# Altium PCB 3043-1-1532.PcbDoc
Units mm, origin at the board's own origin, x right, y up, seen from the top; angles counter-clockwise.
Board outline 79 x 79 mm, 2 copper layers (Top Layer, Bottom Layer); 72 components, 70 nets, 313 pads, 173 vias.
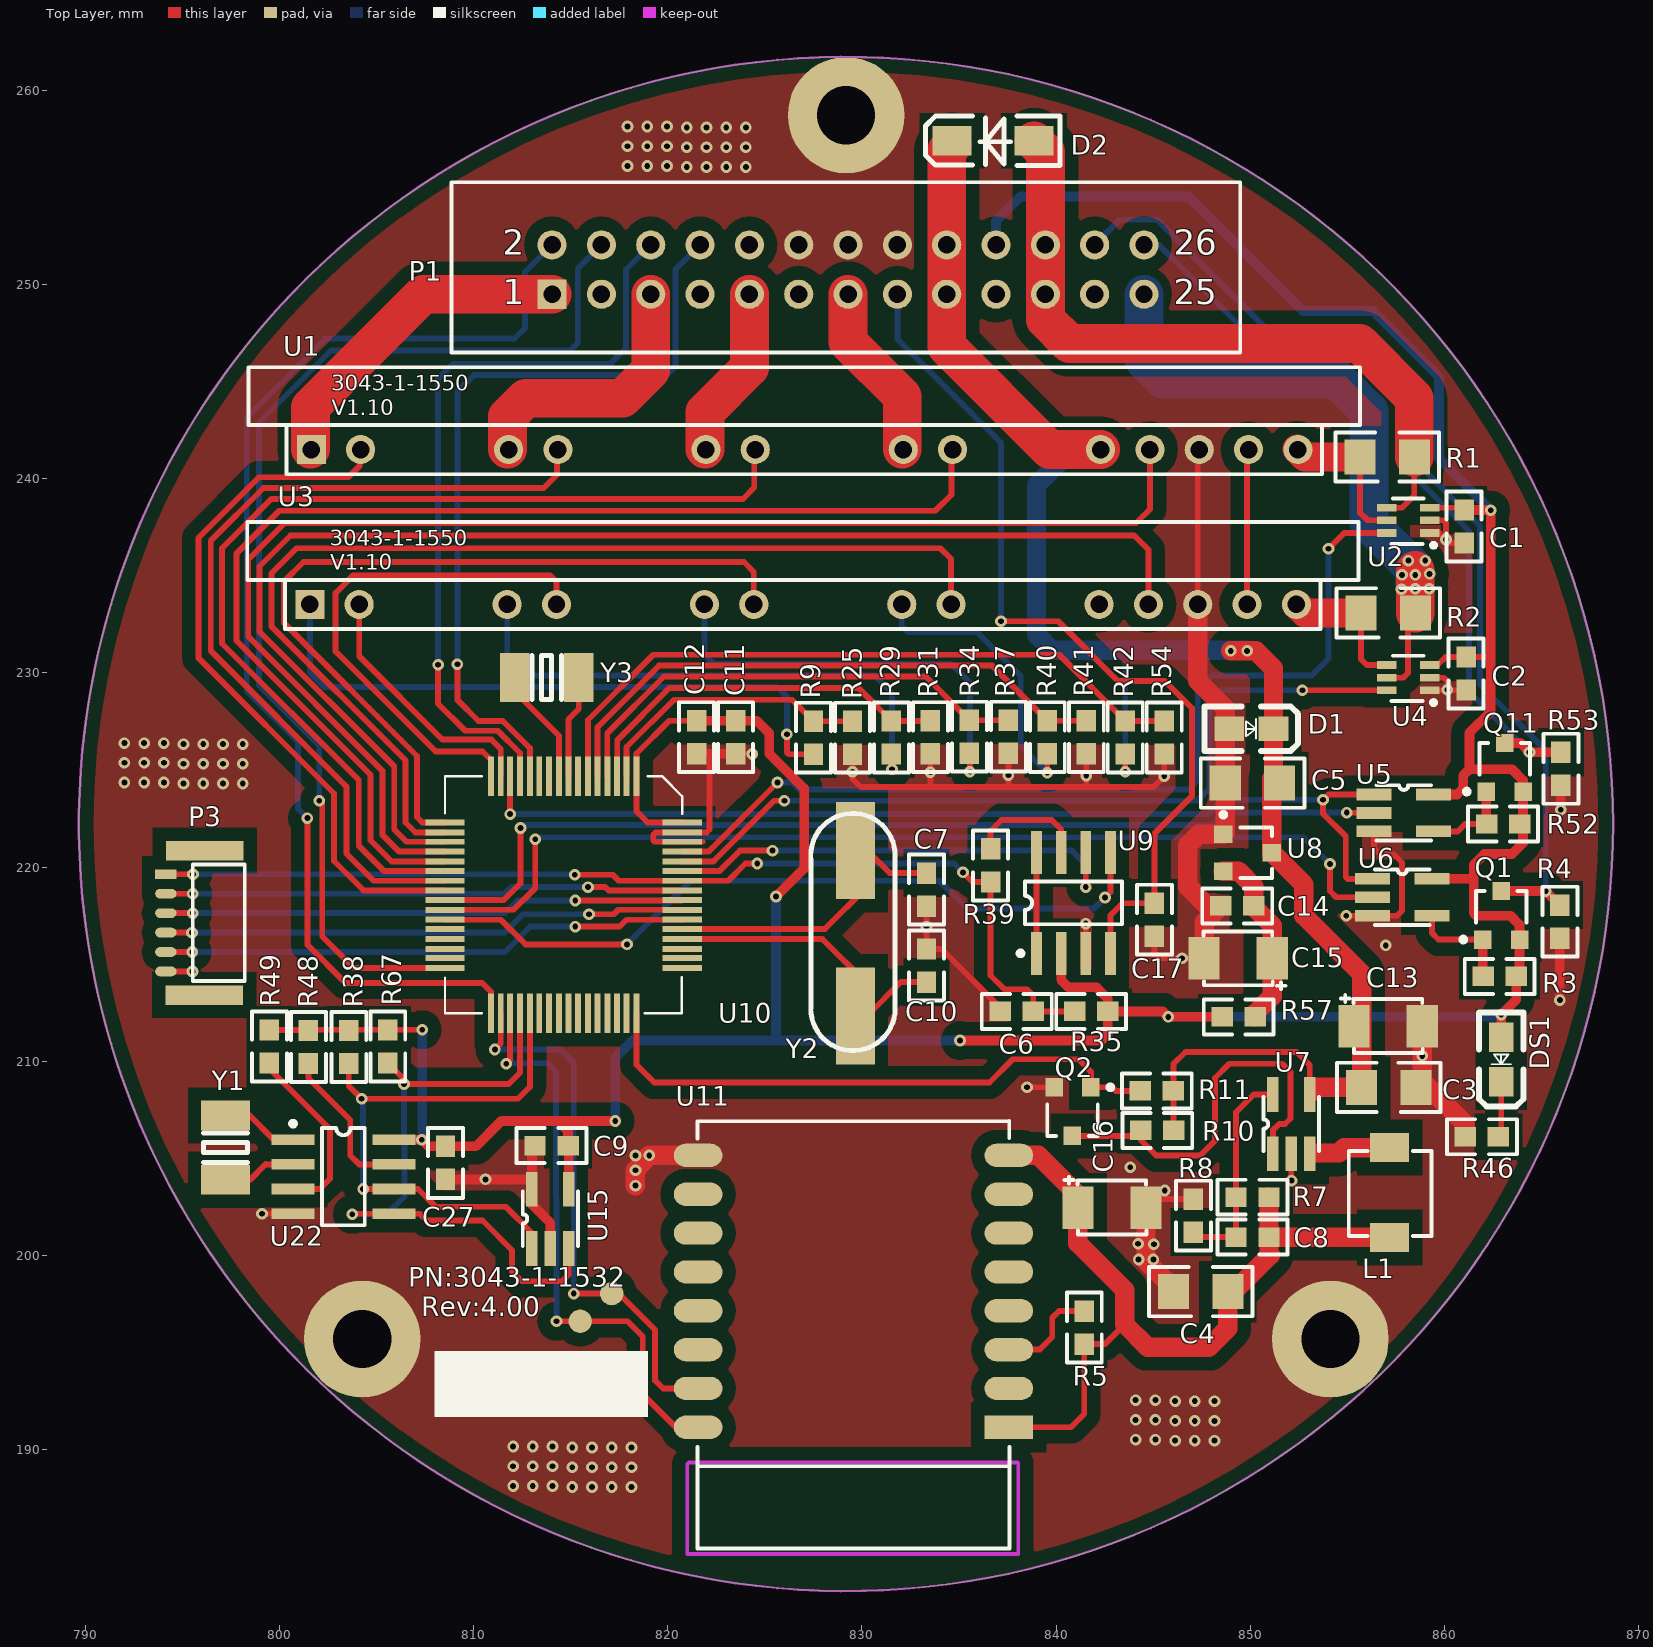
[diagram p0: Top Layer view]
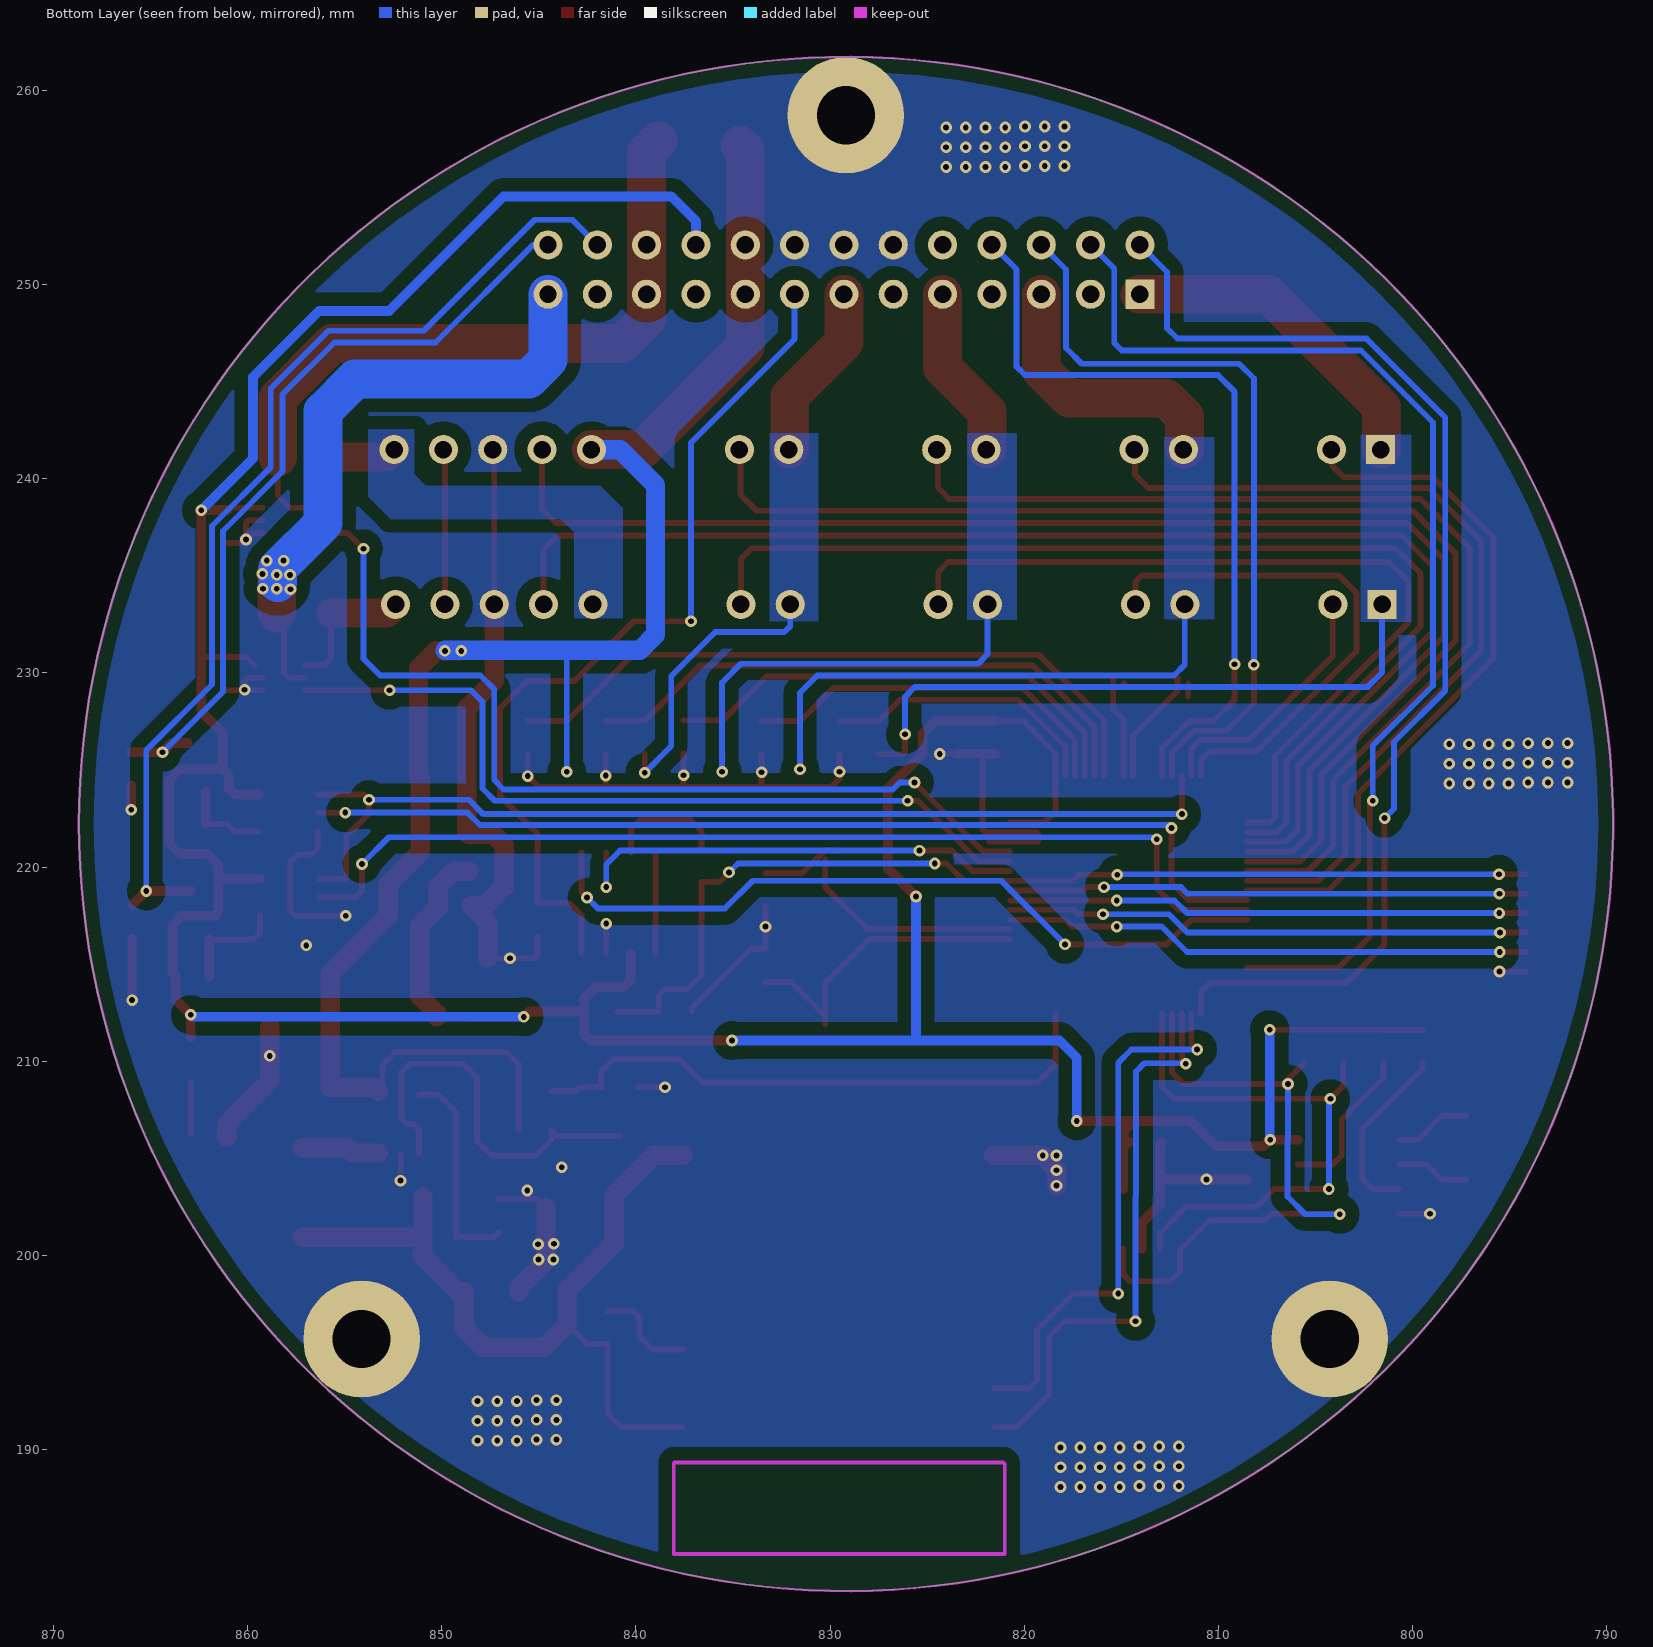
[diagram p1: Bottom Layer view, seen from below]

## Layer stack, top to bottom
Top Layer: signal copper 0.0356
Dielectric: core 0.32, FR-4, Dk 4.8
Bottom Layer: signal copper 0.0356

## Board outline
789.68,222.225 ccw(c829.18,222.225) 829.18,182.725 ccw(c829.18,222.225) 868.68,222.225 ccw(c829.18,222.225) 829.18,261.725 ccw(c829.18,222.225)

## Design rules (kind name [scope] priority, off if disabled: settings)
Clearance [All] p1: gap=0.1
ComponentClearance [All] p1: gap=0 collisioncheckmode=2
HoleSize [All] p1: absolutevalues=TRUE maxlimit=10 minlimit=0.025 maxpercent=80.000 minpercent=20.000
PolygonConnect [All] p1: connectstyle=Direct reliefconductorwidth=0.254 reliefentries=4 polygonreliefangle="90 Angle"
RoutingVias [All] p1: holewidth=0.711 width=1.27 viastyle="Through Hole" minholewidth=0.711 minwidth=1.27 maxholewidth=0.711 maxwidth=1.27
SolderMaskExpansion [All] p1: expansion=0.102
TestPointUsage [All] p1: valid=0 allowmultiple=FALSE
Testpoint [All] p1: side=15 testpointundercomponent=TRUE minsize=1.016 maxsize=2.54 preferedsize=1.524 minholesize=0 maxholesize=1.016 preferedholesize=0.813 testpointgrid=0.025 style=1023 order=-539222988
Width [All] p1: maxlimit=10 minlimit=0.1 preferedwidth=0.254 toplayer_prefwidth=0.5 bottomlayer_prefwidth=0.3 minimp=50.000000 maximp=50.000000 favimp=50.000000
16 further rules are at their usual default settings.

## Classes and differential pairs
component class U_4-LuxSensor: R5 U11
component class U_6-E2p&RTC: C9 C27 DS3 L3 R38 R48 R49 R67 TP4 TP5 U15 U22 Y1
component class U_2-Charge&Discharge: A0+ A1+ A2+ A3+ A4+ A- C1 C2 D2 GND Q3 Q4 Q5 Q6 Q7 Q8 Q9 R1 R2 R6 R13 R16 R17 R18 R19 R20 R21 R22 R23 R27 R32 R36 R70 R71 R72 R73 R74 R75 R76 R77 R78 R87 R88 R89 R90 R91 R92 R93 SEN U1 U2 U3 U4
component class U_1-Power: 5V -5V BAT C3 C4 C5 C8 C13 C14 C15 C16 D1 DS1 J1 J2 J3 J4 L1 NC Q2 R7 R8 R10 R11 R46 R57 R58 R94 R95 R96 R97 R98 R99 R100 R101 R102 TP11 U7 U8 U32 U63 U64 U65 U66 U67 U68 U69 VIN VOUT
component class U_5-ADC: R9 R25 R29 R31 R34 R37 R40 R41 R42 R54

## Components (designator, comment, footprint, x,y, rotation, side; value= is the part's Value field where it differs from the comment)
C1 "100nF_20%_0603" C1608-0603 861.009,237.541 r90 top
C2 "100nF_20%_0603" C1608-0603 861.111,229.972 r90 top
C3 "10uF_20%_1206" CC3216-1206 858.266,208.661 r0 top
C4 "10uF_20%_1206" CC3216-1206 846.303,198.145 r180 top
C5 "10uF_20%_1206" CC3216-1206 848.97,224.333 r180 top
C6 "100nF_20%_0603" C1608-0603 837.971,212.573 r180 top
C7 "22pF_20%_0603" C1608-0603 833.323,218.846 r90 top
C8 "100nF_20%_0603" C1608-0603 850.113,200.95 r180 top
C9 "100nF_20%_0603" C1608-0603 814.019,205.664 r180 top
C10 "22pF_20%_0603" C1608-0603 833.323,214.935 r270 top
C11 "100nF_20%_0603" C1608-0603 823.493,226.695 r270 top
C12 "100nF_20%_0603" C1608-0603 821.487,226.695 r270 top
C13 "100uF_16V_3528" CAP_T_B(3528) 855.345,211.811 r0 top
C14 "4.7uF_20%_0603" C1608-0603 849.325,218.008 r180 top
C15 "100uF_16V_3528" CAP_T_B(3528) 851.129,215.316 r180 top
C16 "100uF_16V_3528" CAP_T_B(3528) 841.121,202.463 r0 top
C17 "100nF_20%_0603" C1608-0603 845.058,217.297 r270 top
C27 "Cap2" C1608-0603 808.558,204.775 r270 top
D1 "5.1V" LED0805 850.163,227.127 r180 top (schematic designator D?)
D2 "SS14" DO-214AB_SS14 839.953,256.134 r180 top
DS1 "LED" LED0805 862.914,209.982 r90 top
L1 "Inductor" L4x4x2_3A 855.65,203.987 r270 top
P1 "Header 13X2" HDR2.54_2x13 826.643,249.58 r0 top
P3 "Header 6" SH-06S 794.182,219.608 r270 top
Q1 "MOSFET-P_SI3401_2301" SO-G3/C2.5 862.965,218.44 r0 top
Q2 "MOSFET-N" SO-G3/C2.5 840.791,206.502 r180 top
Q11 "MOSFET-P_SI3401_2301" SO-G3/C2.5 863.143,226.06 r0 top
R1 "25mR_1%_3225" CC3216-1206 855.904,241.122 r180 top
R2 "25mR_1%_3225" CC3216-1206 855.955,233.096 r180 top
R3 "51K_5%_0603" C1608-0603 862.838,214.376 r0 top
R4 "100K_5%_0603" C1608-0603 865.937,217.195 r270 top
R5 "1K_5%_0603" C1608-0603 841.451,196.291 r90 top
R7 "225K_1%_0603" C1608-0603 850.113,203.008 r180 top
R8 "50K_1%_0603" C1608-0603 847.065,202.057 r90 top
R9 "1K_5%_0603" C1608-0603 827.507,226.67 r90 top
R10 "10K_1%_0603" C1608-0603 845.21,206.451 r0 top
R11 "50K_1%_0603" C1608-0603 845.185,208.483 r180 top
R25 "1K_5%_0603" C1608-0603 829.513,226.67 r90 top
R29 "1K_5%_0603" C1608-0603 831.52,226.681 r90 top
R31 "1K_5%_0603" C1608-0603 833.526,226.695 r90 top
R34 "1K_5%_0603" C1608-0603 835.533,226.72 r90 top
R35 "10K _5%_0603" C1608-0603 841.807,212.573 r0 top
R37 "1K_5%_0603" C1608-0603 837.54,226.72 r90 top
R38 "100K_5%_0603" C1608-0603 803.58,210.744 r90 top
R39 "0R _5%_0603" C1608-0603 836.625,220.091 r270 top
R40 "1K_5%_0603" C1608-0603 839.546,226.695 r90 top
R41 "1K_5%_0603" C1608-0603 841.553,226.695 r90 top
R42 "1K_5%_0603" C1608-0603 843.559,226.681 r90 top
R46 "1K_5%_0603" C1608-0603 861.924,206.121 r0 top
R48 "51K_5%_0603" C1608-0603 801.497,210.744 r270 top
R49 "51K_5%_0603" C1608-0603 799.49,210.769 r270 top
R52 "51K_5%_0603" C1608-0603 863.016,222.225 r0 top
R53 "100K_5%_0603" C1608-0603 865.988,225.069 r270 top
R54 "1K_5%_0603" C1608-0603 845.566,226.681 r90 top
R57 "0R_1%_0603" C1608-0603 849.401,212.293 r180 top
R67 "100K_5%_0603" C1608-0603 805.586,210.769 r90 top
U1 "3043-1-1550" 3043-1-1550_V1.10 821.919,241.529 r0 top
U2 "INA213" SC70-6 859.231,237.211 r180 top
U3 "3043-1-1550" 3043-1-1550_V1.10 821.842,233.553 r0 top
U4 "INA213" SC70-6 859.231,229.108 r180 top
U5 "74LVC1G08" SOT23-5 858.037,221.59 r0 top
U6 "74LVC1G08" SOT23-5 857.961,217.246 r0 top
U7 "AP2406/AP2408-ADJ" SOT23-5 853.313,206.908 r90 top
U8 "XC6206" SO-G3/C2.5 850.773,220.701 r270 top
U9 "MAX706S" SO-8 840.892,218.161 r0 top
U10 "MSP430F149/249/449" QFP-64 820.725,212.446 r180 top
U11 "ESP8266-07" ESP8266-07 837.565,191.16 r180 top (schematic designator U?)
U15 "FM24C02B" SOT23-5 815.162,202.032 r90 top
U22 "DS1337S" SO-8 803.3,204.064 r270 top
Y1 "32.768kHz_SMD" XTAL-3216 797.23,203.911 r90 top
Y2 "8MHz_SMD" XTAL-P4mm_SMD 828.904,215.138 r90 top
Y3 "32.768kHz_SMD" XTAL-3216 815.416,229.768 r180 top

## Footprints (in the part's own frame and the unit in brackets; to place one, negate y for a bottom-side part, rotate by r counter-clockwise, add the part's x,y. Pads: shape width x height; smd on the part's side, far side on the other; paste and mask are expansions set on the pad)
3043-1-1550_V1.10 [mm]
  rect 1.5x1.5 hole 0.9: 1(-20.269,-0.025)
  round 1.5 hole 0.9: 2(-17.729,-0.025) 5(-10.109,-0.025) 6(-7.569,-0.025) 9(0.051,-0.025) 10(2.591,-0.025) 13(10.211,-0.025) 14(12.751,-0.025) 17(20.371,-0.025) 18(22.911,-0.025) 19(25.451,-0.025) 20(27.991,-0.025) 21(30.531,-0.025)
  silkscreen extent -23.49,-1.3 33.73,4.22
C1608-0603 [mm] "Chip Resistor; Body 1.6 x 0.8 mm (LxW typ)"
  rect 1.1x1 smd: 1(-0.85,0) 2(0.85,0)
  silkscreen extent -1.8,-0.9 1.8,0.9
CAP_T_B(3528) [mm]
  rect 1.6x2.2 smd: 1(0,0) 2(3.505,0)
  silkscreen extent -0.69,-1.37 3.53,1.6
CC3216-1206 [mm]
  rect 1.6x1.8 smd: 1(-2.54,0) 2(0.26,0)
  silkscreen extent -3.81,-1.27 1.52,1.27
DO-214AB_SS14 [mm]
  rect 2x1.5 smd: 1(1.092,-1.27) 2(5.309,-1.27)
  silkscreen extent -0.25,-2.54 6.68,0
ESP8266-07 [mm]
  rect 2.5x1.2 smd: 1(0,0)
  oval 2.5x1.2 smd: 2(0,-2) 3(0,-4) 4(0,-6) 5(0,-8) 6(0,-10) 7(0,-12) 8(0,-14) 9(16,-14) 10(16,-12) 11(16,-10) 12(16,-8) 13(16,-6) 14(16,-4) 15(16,-2) 16(16,0)
  silkscreen extent -0.03,-15.76 16.03,6.25
HDR2.54_2x13 [mm]
  rect 1.5x1.5 hole 0.9: 1(-12.598,-0.076)
  round 1.5 hole 0.9: 2(-12.598,2.464) 3(-10.058,-0.076) 4(-10.058,2.464) 5(-7.518,-0.076) 6(-7.518,2.464) 7(-4.978,-0.076) 8(-4.978,2.464) 9(-2.438,-0.076) 10(-2.438,2.464) 11(0.102,-0.076) 12(0.102,2.464) 13(2.642,-0.076) 14(2.642,2.464) 15(5.182,-0.076) 16(5.182,2.464) 17(7.722,-0.076) 18(7.722,2.464) 19(10.262,-0.076) 20(10.262,2.464) 21(12.802,-0.076) 22(12.802,2.464) 23(15.342,-0.076) 24(15.342,2.464) 25(17.882,-0.076) 26(17.882,2.464)
  silkscreen extent -17.78,-3.07 22.83,5.69
L4x4x2_3A [mm]
  rect 1.5x2 smd: 1(-1.575,1.524) 2(3.048,1.524)
  silkscreen extent -1.4,-0.58 2.97,3.68
LED0805 [mil]
  rect 60x50 smd: 1(49.55,-0.2) 2(-40.45,-0.2)
  silkscreen extent -90,-45 100,45
QFP-64 [mil]
  rect 12x80 smd: 1(92,-482) 2(112,-482) 3(131,-482) 4(151,-482) 5(171,-482) 6(190,-482) 7(210,-482) 8(230,-482) 9(249,-482) 10(269,-482) 11(289,-482) 12(308,-482) 13(328,-482) 14(348,-482) 15(367,-482) 16(387,-482) 33(387,-1) 34(367,-1) 35(348,-1) 36(328,-1) 37(308,-1) 38(289,-1) 39(269,-1) 40(249,-1) 41(230,-1) 42(210,-1) 43(190,-1) 44(171,-1) 45(151,-1) 46(131,-1) 47(112,-1) 48(92,-1)
  rect 80x12 smd: 17(480,-388) 18(480,-368) 19(480,-349) 20(480,-329) 21(480,-309) 22(480,-290) 23(480,-270) 24(480,-250) 25(480,-231) 26(480,-211) 27(480,-191) 28(480,-172) 29(480,-152) 30(480,-132) 31(480,-113) 32(480,-93) 49(-1,-93) 50(-1,-113) 51(-1,-132) 52(-1,-152) 53(-1,-172) 54(-1,-191) 55(-1,-211) 56(-1,-231) 57(-1,-250) 58(-1,-270) 59(-1,-290) 60(-1,-309) 61(-1,-329) 62(-1,-349) 63(-1,-368) 64(-1,-388)
  silkscreen extent -1,-482 480,-1
SC70-6 [mm]
  rect 1x0.4 smd: 1(0,0) 2(0,-0.65) 3(0,-1.3) 4(2.2,-1.3) 5(2.2,-0.65) 6(2.2,0)
  silkscreen extent -0.3,-1.78 1.96,0.73
SH-06S [mm]
  rect 1x4 smd: 0(-1.245,1.981) 0(6.198,1.956)
  rect 0.5x1.1 smd: 1(-0.025,-0.025)
  oval 0.5x1.1 smd: 2(0.975,-0.025) 3(1.975,-0.025) 4(2.975,-0.025) 5(3.975,-0.025) 6(4.975,-0.025)
  silkscreen extent -0.53,1.36 5.47,4.04
SO-8 [mm] "Plastic Small Outline; 8 Leads; Body Width 3.9 mm"
  rect 0.55x2.2 smd: 1(-1.905,-2.6) 2(-0.635,-2.6) 3(0.635,-2.6) 4(1.905,-2.6) 5(1.905,2.6) 6(0.635,2.6) 7(-0.635,2.6) 8(-1.905,2.6)
  silkscreen extent -2.85,-2.72 2.5,1.1
SO-G3/C2.5 [mm] "SOT-23; 3 Leads; Body 3.0 x 2.6 mm, inc. leads (LxW max)"
  rect 0.9x0.95 smd: 1(-1.001,-2.164) 2(0.899,-2.164) 3(-0.051,0.336)
  silkscreen extent -2.13,-2.29 1.25,0.34
SOT23-5 [mm]
  rect 1.8x0.6 smd: 1(-1.662,2.154) 2(-1.662,1.204) 3(-1.662,0.254) 4(1.386,0.254) 5(1.386,2.154)
  silkscreen extent -1.54,-0.22 1.26,2.63
XTAL-3216 [mil] "XTAL SMD type, body=1.5x3.2mm"
  rect 60x98.43 smd: 1(0,0) 2(130,0)
  silkscreen extent 35,-45 95,45
XTAL-P4mm_SMD [mm] "XTAL,Pitch 4mm,SMD"
  rect 5x2 smd: 1(-2.794,-0.762) 2(5.715,-0.762)
  silkscreen extent -4.58,-2.81 7.63,1.54

## Part data
C1 C2 C3 C4 C5 C6 C7 C8 C9 C10 C11 C12 C14 C17: library part Cap2, "Capacitor"
C13 C15 C16: library part "Cap Pol2", "Polarized Capacitor (Axial)"
C27: "Capacitor"
D1 D2: library part "D Tunnel1", "Tunnel Diode - RLC Model"
P1: "Header, 13-Pin, Dual row"
P3: library part "Header 3X2", "Header, 3-Pin, Dual row"
Q1 Q11: library part MOSFET-P
R1 R2 R3 R4 R5 R7 R8 R9 R10 R11 R25 R29 R31 R34 R35 R37 R38 R39 R40 R41 R42 R46 R48 R49 R52 R53 R54 R57 R67: library part Res3, "Resistor"
U7: library part AP2406
U9: library part PCF8574T
U10: library part STC15F2K60S2_QFP44
U15: library part 24LC02, "IC"
Y1 Y2 Y3: library part XTAL, "Crystal Oscillator"

## Free pads (board coordinates)
  round 6 hole 3: 0(804.266,195.707) 0(829.183,258.724) 0(854.126,195.707)
  round 1.2 smd: 0(815.492,196.621) 0(817.118,198.044)

## Via types
v1: diameter 0.6, hole 0.3, Top Layer to Bottom Layer, 173 vias

## Nets (pads, with @x,y where several pads share a name; then routed paths per layer and width w, separated by ;. In a path a pad name is that pad's centre, name@x,y a point inside that pad or via, vN(x,y) a via of type N, cw(c..) or ccw(c..) an arc to the next point about the centre after c; other vN are vias at no path point)
A_VB0: R9.2 R25.2 U10.2 | length 14.6
  Top Layer w0.3: U10.2 817.88,226.187 820.318,228.625 826.401,228.625 R9.2 R25.2
A_VB1: R29.2 R31.2 U10.3 | length 19.8
  Top Layer w0.3: U10.3 817.397,226.543 820.09,229.235 829.816,229.235 R29.2 833.513,227.531 R31.2
A_VB2: R34.2 R37.2 U10.4 | length 25
  Top Layer w0.3: U10.4 816.889,226.898 819.81,229.819 833.284,229.819 R34.2 R37.2
A_VB3: R40.2 R41.2 U10.5 | length 30.2
  Top Layer w0.3: U10.5 816.381,227.203 819.556,230.378 836.713,230.378 R40.2 R41.2
A_VB4: R42.2 R54.2 U10.6 | length 35.4
  Top Layer w0.3: U10.6 815.899,227.584 819.252,230.937 840.154,230.937 R42.2 R54.2
A_VCHG: U2.6 U10.61 | length 49.4
  Top Layer w0.3: U10.61 822.122,220.802 ; 822.122,220.828 v1(825.652,224.358) ; v1(854.024,236.398) 854.837,237.211 U2.6
  Bottom Layer w0.3: v1(825.652,224.358) 826.414,224.358 826.77,224.003 846.811,224.003 847.293,224.485 847.293,229.159 848.004,229.87 853.161,229.87 854.024,230.734 v1(854.024,236.398)
A_VDIS: U4.6 U10.60 | length 42.6
  Top Layer w0.3: U10.60 822.35,220.294 825.475,223.418 v1(826.008,223.418) ; v1(852.678,229.108) U4.6
  Bottom Layer w0.3: v1(826.008,223.418) 847.268,223.418 847.903,224.053 847.903,228.524 848.487,229.108 v1(852.678,229.108)
CHG_0: U1.2 U10.24 | length 36.6
  Top Layer w0.3: U1.2@804.139,241.529 804.139,240.665 803.554,240.081 798.957,240.081 795.833,236.957 795.833,230.784 802.818,223.799 802.818,220.32 804.342,218.796 U10.24
CHG_1: U1.6 U10.23 | length 45.2
  Top Layer w0.3: U10.23 804.85,219.304 803.453,220.701 803.453,224.155 796.468,231.14 796.468,236.804 799.186,239.522 813.613,239.522 814.299,240.208 U1.6@814.299,241.529
CHG_2: U1.10 U10.22 | length 53.9
  Top Layer w0.3: U10.22 805.383,219.812 804.088,221.107 804.088,224.485 797.052,231.521 797.052,236.423 799.592,238.963 823.874,238.963 824.459,239.547 U1.10@824.459,241.529
CHG_3: U1.14 U10.21 | length 62.3
  Top Layer w0.3: U10.21 805.79,220.294 804.697,221.386 804.697,224.765 797.789,231.673 797.789,236.144 799.998,238.354 833.78,238.354 834.619,239.192 U1.14@834.619,241.529
CHG_4: U1.18 U10.20 | length 71.2
  Top Layer w0.3: U10.20 806.171,220.802 805.307,221.666 805.307,224.968 798.398,231.877 798.398,235.839 800.278,237.719 844.118,237.719 844.829,238.43 U1.18 ; U1.18@844.779,241.503 U1.18@844.779,241.529
DCHG_0: U3.2 U10.15 | length 13.3
  Top Layer w0.3: U3.2 804.113,230.861 808.406,226.568 810.92,226.568 811.403,226.085 U10.15
DCHG_1: U3.6 U10.16 | length 27.2
  Top Layer w0.3: U10.16 810.895,225.527 810.463,225.958 808.05,225.958 802.894,231.115 802.894,234.112 803.808,235.026 813.943,235.026 814.273,234.696 U3.6
DCHG_2: U3.10 U10.17 | length 43
  Top Layer w0.3: U10.17 807.364,222.301 807.085,222.58 807.085,225.73 800.227,232.588 800.227,234.696 801.243,235.712 823.925,235.712 824.433,235.204 U3.10
DCHG_3: U3.14 U10.18 | length 56
  Top Layer w0.3: U10.18 807.009,221.793 806.501,222.301 806.501,225.501 799.592,232.41 799.592,235.128 800.887,236.423 834.034,236.423 834.593,235.864 U3.14
DCHG_4: U3.18 U10.19 | length 68.8
  Top Layer w0.3: U10.19 806.552,221.31 805.917,221.945 805.917,225.196 798.982,232.131 798.982,235.483 800.583,237.084 844.017,237.084 844.753,236.347 U3.18
E_INT: C17.1 P1.15 U9.4 | length 46.1
  Top Layer w0.3: v1(837.159,232.664) 840.105,232.664 843.178,229.591 845.591,229.591 846.988,228.194 846.988,223.647 845.058,221.717 C17.1 843.419,218.147 842.797,217.526 U9.4
  Bottom Layer w0.3: P1.15 831.825,247.193 837.159,241.859 v1(837.159,232.664)
EXT_INT: U9.5 U10.27 | length 39.1
  Top Layer w0.3: U10.27 811.403,217.297 812.673,216.027 v1(817.905,216.027) ; v1(842.518,218.44) 842.797,218.719 U9.5
  Bottom Layer w0.3: v1(817.905,216.027) 821.182,219.304 833.984,219.304 835.406,217.881 841.959,217.881 v1(842.518,218.44)
FLASH_CTRL: U5.1 U6.1 U10.14 | length 52.7
  Top Layer w0.3: v1(811.886,222.733) U10.14 ; U6.1 855.019,219.401 854.913,219.507 854.913,221.59 853.745,222.758 v1(853.745,223.469) 854.02,223.744 U5.1
  Bottom Layer w0.3: v1(811.886,222.733) 847.852,222.733 848.589,223.469 v1(853.745,223.469)
FLS_CS_A: U5.2 U10.25 | length 51.4
  Top Layer w0.3: U10.25 811.555,218.313 812.419,219.177 v1(812.419,222.021) ; v1(854.964,222.809) U5.2
  Bottom Layer w0.3: v1(812.419,222.021) 812.571,222.174 848.03,222.174 848.665,222.809 v1(854.964,222.809)
FLS_CS_B: U6.2 U10.26 | length 52.7
  Top Layer w0.3: U10.26 812.063,217.805 813.181,218.923 v1(813.181,221.437) ; v1(854.1,220.167) 854.1,218.77 854.42,218.451 U6.2
  Bottom Layer w0.3: v1@813.283,221.539 852.729,221.539 v1(854.1,220.167)
FLS_OUT_A: P1.26 Q11.3 R53.1 | length 40.9
  Top Layer w0.5: Q11.3 863.899,226.396 v1(864.376,225.919) R53.1
  Bottom Layer w0.3: P1.26 845.287,252.044 850.316,247.015 855.523,247.015 858.19,244.348 858.19,240.386 861.263,237.312 861.263,229.032 v1(864.376,225.919)
FLS_OUT_B: P1.24 Q1.3 R4.1 | length 52.8
  Top Layer w0.5: Q1.3 v1(865.207,218.776) R4.1
  Bottom Layer w0.3: P1.24 843.28,253.34 845.21,253.34 850.925,247.625 855.828,247.625 858.799,244.653 858.799,240.589 861.822,237.566 861.822,229.413 865.207,226.028 v1(865.207,218.776)
GND: C1.1 C2.1 C3.2 C4.2 C5.2 C6.2 C7.1 C9.2 C10.1 C11.2 C12.2 C13.2 C14.2 C15.2 C16.2 C17.2 C27.2 D1.1 P1.12 P1.14 P1.16 P3.6 pad.0@804.266,195.707 pad.0@829.183,258.724 pad.0@854.126,195.707 Q2.2 R4.2 R8.2 R25.1 R31.1 R37.1 R41.1 R46.1 R53.2 R54.1 U1.19 U2.1 U2.2 U3.19 U4.1 U4.2 U5.3 U6.3 U7.2 U8.1 U9.3 U10.62 U10.63 U11.9 U15.2 U15.5 U22.4 | length 133.1
  Top Layer w0.3: P3.6 v1(795.528,214.63) ; v1(799.109,202.159) U22.4 ; 821.792,221.31 819.328,221.31 819.252,221.386 819.252,221.666 819.379,221.793 821.995,221.793 822.147,221.945 822.147,225.794 822.096,225.845 ; C11.2 v1(824.357,225.831) ; R25.1 829.513,224.561 829.945,224.13 845.007,224.13 v1(845.566,224.688) R54.1 ; C7.1 C10.1 834.099,215.785 837.121,212.762 C6.2 ; 833.526,224.155 R31.1 ; 837.54,224.155 R37.1 ; v1(838.499,208.666) Q2.2 ; U9.3 v1(841.527,217.094) ; 841.553,224.13 R41.1 ; C16.2 845.07,202.907 R8.2 ; C17.2 845.058,215.519 845.261,215.316 C15.2 ; U3.19 U1.19@847.293,241.427 ; v1@852.109,203.871 U7.2 ; v1(854.938,217.501) 857.555,217.501 857.809,217.754 857.809,220.243 857.402,220.65 856.691,220.65 856.375,220.966 U5.3 ; U4.1 861.097,229.108 C2.1 ; U4.2 859.953,229.758 860.196,229.514 v1(860.146,229.133) ; U2.1 859.739,237.211 860.259,236.691 C1.1 ; U2.2 859.927,237.861 860.069,237.719 v1@860.069,236.88
  Top Layer w0.5: C27.2 812.92,203.925 U15.5@813.008,204.013 ; C9.2@812.89,205.867 813.008,205.749 813.008,202.637 813.958,201.687 U15.2 ; C12.2 C11.2 ; v1(865.937,213.157) R4.2 ; v1(865.988,222.961) R53.2
  Top Layer w1: v1(818.337,203.606) v1(818.337,204.394) v1(819.053,205.16) U11.9 ; C16.2 844.626,199.72 846.043,198.304 C4.2 ; U3.19 847.293,229.591 848.71,228.174 848.71,221.802 U8.1 847.354,221.701 846.785,221.132 846.785,218.999 847.776,218.008 C14.2 847.623,217.156 C15.2 ; C13.2 858.85,208.985 861.074,206.762 R46.1
  other v1: 815.086,188.087 816.102,188.087 817.118,188.087 818.134,188.087 812.038,188.138 813.054,188.138 814.07,188.138 815.086,189.103 816.102,189.103 817.118,189.103 818.134,189.103 812.038,189.154 813.054,189.154 814.07,189.154 815.086,190.119 816.102,190.119 817.118,190.119 818.134,190.119 812.038,190.17 813.054,190.17 814.07,190.17 846.125,190.475 847.141,190.475 848.157,190.475 844.093,190.525 845.109,190.525 846.125,191.491 847.141,191.491 848.157,191.491 844.093,191.541 845.109,191.541 846.125,192.507 847.141,192.507 848.157,192.507 844.093,192.557 845.109,192.557 844.245,199.796 845.007,199.796 845.033,200.584 844.22,200.609 845.591,203.352 852.119,203.86 810.616,203.925 843.813,204.546 818.337,205.156 858.85,210.287 846.48,215.316 856.971,215.976 833.323,216.941 795.071,224.307 796.087,224.307 797.103,224.307 798.119,224.307 792.023,224.358 793.039,224.358 794.055,224.358 841.553,224.714 837.54,224.739 833.526,224.892 829.513,224.917 795.071,225.323 796.087,225.323 797.103,225.323 798.119,225.323 792.023,225.374 793.039,225.374 794.055,225.374 795.071,226.339 796.087,226.339 797.103,226.339 798.119,226.339 792.023,226.39 793.039,226.39 794.055,226.39 860.079,236.871 820.979,256.057 821.995,256.057 823.011,256.057 824.027,256.057 817.931,256.108 818.947,256.108 819.963,256.108 820.979,257.073 821.995,257.073 823.011,257.073 824.027,257.073 817.931,257.124 818.947,257.124 819.963,257.124 820.979,258.089 821.995,258.089 823.011,258.089 824.027,258.089 817.931,258.14 818.947,258.14 819.963,258.14
IIC0_SCL: R38.1 U10.37 U15.1 U22.6 | length 29.8
  Top Layer w0.3: R38.1 803.58,208.737 v1(804.24,208.077) 812.292,208.077 812.902,208.686 U10.37 ; v1(804.316,203.429) 807.136,203.429 808.05,202.514 811.657,202.514 813.008,201.163 U15.1
  Bottom Layer w0.3: v1(804.316,203.429) v1@804.316,208.051
IIC0_SDA: R67.1 U10.36 U15.3 U22.5 | length 34.4
  Top Layer w0.3: v1@803.656,202.159 807.237,202.159 807.593,201.803 810.463,201.803 811.987,200.279 811.987,199.187 812.495,198.679 814.553,198.679 814.908,199.034 U15.3 ; R67.1 806.425,209.081 v1(806.425,208.839) 811.809,208.839 812.394,209.423 U10.36
  Bottom Layer w0.3: v1(803.758,202.133) 805.536,202.133 806.45,203.048 v1(806.425,208.839)
IIC1_SCL: P1.8 U10.12 | length 40.6
  Top Layer w0.3: v1(809.168,230.454) 809.168,228.625 810.26,227.533 811.505,227.533 812.902,226.136 U10.12
  Bottom Layer w0.3: v1(809.168,230.454) 809.168,244.475 810.031,245.339 819.963,245.339 820.395,245.77 820.395,250.774 P1.8
IIC1_SDA: P1.6 U10.13 | length 39.4
  Top Layer w0.3: v1(808.177,230.429) 808.177,228.422 809.574,227.025 811.251,227.025 812.394,225.882 U10.13
  Bottom Layer w0.3: v1(808.177,230.429) 808.177,245.161 808.939,245.923 817.042,245.923 817.855,246.736 817.855,250.774 P1.6
MCU_RXD: P1.2 U10.33 | length 61.1
  Top Layer w0.3: v1(801.446,222.529) 801.446,216.002 803.402,214.046 810.438,214.046 810.895,213.589 U10.33
  Bottom Layer w0.3: v1(801.446,222.529) 800.964,223.012 800.964,226.441 798.322,229.083 798.322,243.154 802.386,247.218 812.114,247.218 812.648,247.752 812.648,250.647 P1.2
MCU_RXD2: pad.0@815.492,196.621 U10.35 U11.16 | length 29.5
  Top Layer w0.3: v1(811.682,209.88) 811.886,210.083 U10.35 ; v1(814.273,196.621) 817.931,196.621 818.718,195.834 818.718,192.862 820.42,191.16 U11.16
  Bottom Layer w0.3: v1@811.708,209.906 813.816,209.906 814.248,209.474 v1(814.273,196.621)
MCU_TXD: P1.4 U10.32 | length 58.5
  Top Layer w0.3: v1(802.056,223.418) 802.208,223.266 802.208,216.433 803.834,214.808 U10.32
  Bottom Layer w0.3: v1(802.056,223.418) 802.056,226.263 798.957,229.362 798.957,242.9 802.665,246.609 814.984,246.609 815.365,246.99 815.365,250.825 P1.4
MCU_TXD2: pad.0@817.118,198.044 U10.34 U11.15 | length 28.2
  Top Layer w0.3: v1(811.098,210.617) 811.403,210.922 U10.34 ; v1(815.162,198.044) 817.474,198.044 819.353,196.164 819.353,193.573 819.766,193.16 U11.15
  Bottom Layer w0.3: v1(811.098,210.617) 814.476,210.617 815.162,209.931 v1(815.162,198.044)
NetC7_2: C7.2 U10.53 Y2.2 | length 16
  Top Layer w0.3: U10.53 828.091,216.814 830.25,218.973 Y2.2@830.25,220.396 ; Y2.2 830.275,220.853 831.432,219.696 C7.2
NetC8_2: C8.2 R7.2 R8.1 U7.5 | length 11
  Top Layer w0.3: R8.1 847.321,200.95 C8.2 849.263,207.379 850.177,208.294 U7.5 ; R7.2@849.237,202.982 R7.2
NetC10_2: C10.2 U10.52 Y2.1 | length 16.4
  Top Layer w0.3: U10.52 827.964,216.306 830.25,214.02 Y2.1@830.25,211.887 ; Y2.1@830.262,212.344 832.002,214.085 C10.2
NetDS1_2: DS1.2 R46.2 | length 2.7
  Top Layer w0.3: R46.2@862.919,206.267 DS1.2
NetL1_1: L1.1 U7.3 | length 4
  Top Layer w1: U7.3@853.262,205.283 854.558,205.283 854.837,205.562 L1.1
NetQ1_1: Q1.1 R3.1 U6.4 | length 5.5
  Top Layer w0.3: U6.4 859.347,216.623 859.694,216.276 Q1.1
  Top Layer w0.5: R3.1@861.964,214.4 Q1.1
NetQ11_1: Q11.1 R52.1 U5.4 | length 4.5
  Top Layer w0.3: U5.4 860.679,221.844 861.06,222.225 R52.1
  Top Layer w0.5: R52.1@862.142,222.248 Q11.1
NetR5_2: R5.2 U11.3 | length 5.3
  Top Layer w0.3: U11.3 839.152,195.16 839.8,195.809 839.8,196.799 840.142,197.141 R5.2
NetR39_1: R39.1 U9.7 | length 6.2
  Top Layer w0.3: R39.1 836.625,221.869 837.184,222.428 839.775,222.428 840.257,221.945 U9.7
NetR48_2: R48.2 U22.7 | length 8.1
  Top Layer w0.3: R48.2 801.497,209.144 803.656,206.985 803.656,205.156 804.113,204.699 U22.7
NetR49_2: R49.2 U22.3 | length 9.4
  Top Layer w0.3: R49.2 799.49,209.626 802.615,206.502 802.615,203.962 802.081,203.429 U22.3
NetU9_1: U9.1 U9.8 | length 5.2
  Top Layer w0.3: U9.1 U9.8
NetU10_8: U10.8 Y3.1 | length 5.3
  Top Layer w0.3: Y3.1@814.857,229.464 Y3.1@814.883,229.438 ; U10.8 814.883,227.609 815.416,228.143 Y3.1
NetU10_9: U10.9 Y3.2 | length 6.7
  Top Layer w0.3: Y3.2@811.555,228.778 Y3.2@811.555,229.464 ; Y3.2 812.114,229.057 814.4,226.771 U10.9
NetU22_1: U22.1 Y1.2 | length 3.9
  Top Layer w0.3: Y1.2 798.474,207.213 U22.1@799.694,205.994 ; U22.1@799.744,205.969 U22.1
NetU22_2: U22.2 Y1.1 | length 3.8
  Top Layer w0.3: Y1.1 798.5,203.911 799.313,204.724 ; 799.363,204.699 U22.2
NRST: C6.1 P3.1 R35.1 R39.2 U10.58 | length 53.7
  Top Layer w0.3: P3.1 v1(795.553,219.634) ; v1(815.213,219.608) 817.169,219.608 817.474,219.304 823.112,219.304 824.001,220.193 v1(824.611,220.193) ; v1(835.203,219.735) 835.697,219.241 R39.2 836.625,214.427 837.336,213.716 838.505,213.716 838.821,213.399 C6.1 R35.1
  Bottom Layer w0.3: v1(795.553,219.634) v1@815.188,219.634 ; v1(824.611,220.193) 834.746,220.193 v1(835.203,219.735)
P_CTRL: Q2.3 R10.1 U7.1 | length 21
  Top Layer w0.3: Q2.3 844.076,206.166 R10.1 844.36,205.955 845.16,205.156 847.42,205.156 848.182,205.918 848.182,209.144 848.919,209.88 851.637,209.88 852.068,209.448 852.068,207.061 851.789,206.781 851.484,206.781 851.159,206.456 U7.1
TCK: P3.2 U10.57 | length 26.8
  Top Layer w0.3: P3.2 v1(795.537,218.634) ; v1(815.899,218.973) 816.788,218.973 816.966,218.796 U10.57
  Bottom Layer w0.3: v1(795.537,218.634) 811.597,218.634 811.936,218.973 v1(815.899,218.973)
TDI: P3.4 U10.55 | length 27.1
  Top Layer w0.3: P3.4 v1(795.505,216.634) ; v1(815.95,217.576) 817.22,217.576 817.448,217.805 U10.55
  Bottom Layer w0.3: v1(795.505,216.634) 811.603,216.634 812.546,217.576 v1(815.95,217.576)
TDO: P3.5 U10.54 | length 27.3
  Top Layer w0.3: P3.5 v1(795.515,215.634) ; v1(815.238,216.941) 817.524,216.941 817.88,217.297 U10.54
  Bottom Layer w0.3: v1(795.515,215.634) 811.619,215.634 812.927,216.941 v1(815.238,216.941)
TMS: P3.3 U10.56 | length 26.8
  Top Layer w0.3: P3.3 v1(795.547,217.634) ; v1(815.238,218.288) U10.56@820.725,218.288
  Bottom Layer w0.3: v1(795.547,217.634) 811.613,217.634 812.267,218.288 v1(815.238,218.288)
V_2V8: C14.1 C15.1 R57.1 U8.2 | length 9.4
  Top Layer w1: U8.2 849.386,219.801 850.175,219.012 850.175,217.946 851.129,216.992 851.129,213.36 850.251,212.483 R57.1
V_BT0: P1.1 R9.1 U1.1 U3.1 | length 49.9
  Top Layer w0.3: v1(826.135,226.847) 826.135,225.908 826.223,225.82 R9.1
  Top Layer w2: U1.1@801.599,241.529 801.599,243.688 807.415,249.504 P1.1
  Bottom Layer w0.3: U3.1 801.573,230.022 802.31,229.286 825.627,229.286 826.135,228.778 v1(826.135,226.847)
V_BT1: P1.5 R29.1 U1.5 U3.5 | length 42.1
  Top Layer w0.3: v1@831.52,225.12 R29.1
  Top Layer w2: U1.5@811.759,241.529 811.759,243.205 812.698,244.145 817.677,244.145 819.125,245.593 P1.5
  Bottom Layer w0.3: U3.5 811.733,230.429 812.292,229.87 830.656,229.87 831.545,228.981 v1(831.545,225.044)
V_BT2: P1.9 R34.1 U1.9 U3.9 | length 31.3
  Top Layer w0.3: R34.1 v1(835.558,224.917)
  Top Layer w2: U1.9@821.919,241.529 821.919,243.434 824.205,245.72 P1.9
  Bottom Layer w0.3: U3.9 821.893,230.962 822.376,230.48 834.593,230.48 835.558,229.514 v1(835.558,224.917)
V_BT3: P1.13 R40.1 U1.13 U3.13 | length 24
  Top Layer w0.3: v1(839.546,224.866) R40.1
  Top Layer w2: P1.13 829.285,247.04 832.079,244.246 U1.13@832.079,241.529
  Bottom Layer w0.3: U3.13 832.053,232.41 832.358,232.105 835.914,232.105 838.175,229.845 838.175,226.238 v1(839.546,224.866)
V_BT4: C3.1 C5.1 C13.1 D1.2 D2.2 P1.17 P1.18 R10.2 R11.1 R42.1 U1.17 U7.4 U8.3 | length 91.8
  Top Layer w0.3: v1(843.559,224.917) R42.1 ; R10.2 846.035,206.477 846.035,209.867 846.658,210.49 852.373,210.49 853.059,209.804 U7.4
  Top Layer w1: v1(848.995,231.14) 850.29,231.14 851.191,230.24 851.191,224.652 851.109,224.569 U8.3 852.754,219.106 852.754,217.5 855.726,214.528 C3.1 853.426,208.661 U7.4@853.262,208.458
  Top Layer w2: D2.2@834.644,257.175 834.365,256.896 834.365,246.812 839.673,241.503 U1.17
  Bottom Layer w0.3: v1(843.559,224.917) 843.559,231.14
  Bottom Layer w1: U1.17 840.816,241.503 838.987,239.674 838.987,231.978 839.8,231.165 v1@849.808,231.165
  other v1: 849.833,231.14
V_CHG: R1.2 U1.21 U2.5 U3.17 | length 7.8
  Top Layer w0.3: R1.2 855.644,238.258 856.041,237.861 U2.5
  Top Layer w1.5: U1.21@852.399,241.529 852.805,241.122 R1.2
V_DISCHG: R2.2 U3.21 U4.4 | length 7.3
  Top Layer w0.3: R2.2 855.695,230.714 856.001,230.408 U4.4
  Top Layer w1.5: U3.21 852.805,233.096 R2.2
VCC_2V8: C1.2 C2.2 C9.1 C11.1 C12.1 C27.1 DS1.1 P1.20 Q1.2 Q11.2 R3.2 R35.2 R38.2 R48.1 R49.1 R52.2 R57.2 R67.2 U2.3 U4.3 U5.5 U6.5 U9.2 U10.1 U10.64 U15.4 U22.8 | length 200.2
  Top Layer w0.3: R49.1 801.497,211.623 803.58,211.626 805.586,211.63 v1(807.364,211.633) ; U10.64 818.972,222.301 818.388,222.885 818.388,225.857 820.076,227.545 C12.1 ; U2.3 860.889,238.511 C1.2 ; U4.3@859.642,230.408 860.056,230.822 862.316,230.822 ; 861.39,219.401 861.496,219.401 ; Q1.2@863.783,216.276 Q1.2 ; Q11.2@864.042,223.698 Q11.2
  Top Layer w0.5: U22.8 v1(807.339,205.969) 807.683,205.625 810.119,205.625 811.428,206.934 v1(817.296,206.934) ; 814.361,206.934 814.869,206.426 C9.1 ; C9.1@814.59,205.867 814.908,205.549 U15.4 ; C12.1 824.574,227.545 825.221,226.898 825.221,225.857 827.024,224.053 827.024,219.939 v1(825.576,218.491) ; v1(835.05,211.074) 842.34,211.074 842.657,211.391 842.657,213.247 842.086,213.817 840.638,213.817 840.257,214.198 U9.2 ; R35.2 845.49,212.573 v1(845.769,212.293) R57.2 ; U6.5 861.39,219.401 ; U5.5 860.649,223.744 860.958,224.053 860.958,224.714 861.289,225.044 ; C1.2 862.369,238.391 v1(862.381,238.379) 862.381,228.016 861.289,226.924 861.289,225.044 ; DS1.1 v1(862.919,212.4) 863.688,213.169 R3.2 ; R3.2@863.864,214.552 863.864,217.033 863.397,217.5 861.644,217.5 861.496,217.648 861.496,220.121 862.051,220.675 863.473,220.675 864.042,221.244 864.042,224.475 863.473,225.044 861.289,225.044
  Bottom Layer w0.3: v1(807.339,205.969) v1@807.364,205.994
  Bottom Layer w0.5: v1@807.364,205.994 v1(807.364,211.633) ; v1(817.296,206.934) 817.296,210.185 818.185,211.074 v1(835.05,211.074) ; 825.576,211.125 v1(825.576,218.491) ; P1.20 836.905,253.263 838.175,254.533 846.811,254.533 852.703,248.641 856.31,248.641 859.714,245.237 859.714,241.046 v1(862.381,238.379) ; v1(845.769,212.293) 862.813,212.293 v1(862.919,212.4)
VCC_3V3: C4.1 C8.1 C16.1 L1.2 R5.1 R7.1 U11.1 U11.8 | length 42.6
  Top Layer w0.3: U11.1 840.765,191.16 841.451,191.846 R5.1 842.506,195.441 843.534,196.469
  Top Layer w1: U11.8 839.084,205.16 841.121,203.124 841.121,200.635 843.534,198.222 843.534,196.469 844.728,195.275 847.852,195.275 848.843,196.266 C4.1 849.147,198.145 851.027,200.025 851.027,200.05 ; 850.963,199.961 R7.1 ; C8.1 C8.1@851.013,200.9 ; C8.1@851.103,200.939 L1.2
VCC_BAT: P1.25 R2.1 U4.5 | length 32.5
  Top Layer w0.3: U4.5 857.875,229.758 858.114,229.997 858.114,232.715 R2.1
  Top Layer w2: R2.1 v1@858.495,235.28
  Bottom Layer w2: P1.25 844.525,246.126 845.515,245.135 854.456,245.135 856.107,243.484 856.107,237.719 858.418,235.407 858.444,234.645
  other v1: 857.783,234.315 858.495,234.34 859.206,234.34 857.809,235.052 858.495,235.052 859.231,235.102 858.139,235.788 859.003,235.788
VCC_CHARGE: D2.1 P1.21 P1.22 R1.1 U2.4 | length 36.8
  Top Layer w0.3: U2.4 857.813,238.511 858.444,239.141 R1.1
  Top Layer w2: D2.1 839.445,256.819 839.445,248.209 840.689,246.964 855.624,246.964 858.444,244.145 R1.1
VCC_TH: U1.20 U3.20 | length 8.3
  Top Layer w0.3: U3.20 849.833,238.938 ; 849.833,238.684 849.833,241.427 U1.20 ; U1.20@849.859,241.503 U1.20@849.859,241.529
WDT: U9.6 U10.59 | length 24.5
  Top Layer w0.3: U10.59 822.681,219.812 823.722,220.853 v1(825.398,220.853) ; v1(841.527,218.973) U9.6
  Bottom Layer w0.3: v1(825.398,220.853) 840.816,220.853 841.527,220.142 v1(841.527,218.973)
WIFI_PWR_CTRL: Q2.1 R11.2 U10.48 | length 30.6
  Top Layer w0.3: U10.48 818.388,209.829 819.302,208.915 836.574,208.915 837.768,210.109 841.146,210.109 841.792,209.464 Q2.1 842.894,208.666 843.077,208.483 R11.2
pads on no net: P1.3 P1.7 P1.10 P1.11 P1.19 P1.23 P3.0 U10.7 U10.10 U10.11 U10.28 U10.29 U10.30 U10.31 U10.38 U10.39 U10.40 U10.41 U10.42 U10.43 U10.44 U10.45 U10.46 U10.47 U10.49 U10.50 U10.51 U11.2 U11.4 U11.5 U11.6 U11.7 U11.10 U11.11 U11.12 U11.13 U11.14

## Polygon pours and split planes (outlines as drawn)
GND on Top Layer (solid, remove dead copper): 789.711,261.696 868.832,261.696 868.832,182.855 789.559,182.855 789.559,261.417
GND on Bottom Layer (solid, remove dead copper): 789.508,261.747 869.01,261.747 869.01,182.448 789.407,182.448 789.407,261.849
V_BT0 on Bottom Layer (solid, remove dead copper): 800.049,242.265 802.665,242.265 802.665,232.639 800.075,232.639 800.075,242.24
V_BT1 on Bottom Layer (solid, remove dead copper): 810.209,242.138 812.8,242.138 812.8,232.766 810.209,232.766
V_BT2 on Bottom Layer (solid, remove dead copper): 820.445,242.341 822.935,242.341 822.935,232.74 820.395,232.74 820.395,242.316
V_BT3 on Bottom Layer (solid, remove dead copper): 830.555,242.341 833.095,242.341 833.095,232.664 830.605,232.664 830.605,242.418
V_CHG on Bottom Layer (solid, remove dead copper): 840.664,232.894 840.664,238.481 841.832,239.649 850.824,239.649 851.408,240.233 851.408,242.545 853.77,242.545 853.77,239.065 852.932,238.227 852.627,237.922 843.864,237.922 843.178,237.236 843.178,232.816 840.664,232.816

## Keep-outs
Keep-Out Layer:
  circle w0.127: c829.18,222.225 r39.5
  lines w0.2: 821.004,184.633 821.004,189.281 821.08,189.357 838.022,189.357 838.048,189.306 838.048,184.633 821.004,184.633

## Silkscreen, mask and mechanical layers (free items; w line width, h text height)
Top Overlay:
  rectangle: 807.999,191.684 818.972,195.097
  text "PN:3043-1-1532" at 806.628,198.399 h1
  text "Rev:4.00" at 807.314,196.875 h1

## Text inside footprints (layer, text, board x,y; h text height)
P1: Top Overlay "26" at 846.049,251.536 h1.27; Top Overlay "25" at 846.049,248.996 h1.27; Top Overlay "1" at 811.505,248.996 h1.27; Top Overlay "2" at 811.505,251.536 h1.27
U1: Top Overlay "V1.10" at 802.691,243.281 h0.8
U3: Top Overlay "V1.10" at 802.615,235.306 h0.8